# Altium PCB Ethernet_bridge.PcbDoc
Units mil, origin at the board's own origin, x right, y up, seen from the top; angles counter-clockwise.
Board outline 6000 x 4000 mil, 2 copper layers (Top Layer, Bottom Layer); 120 components, 82 nets, 415 pads, 0 vias.
Unrouted connection lines stored in the file: 282.
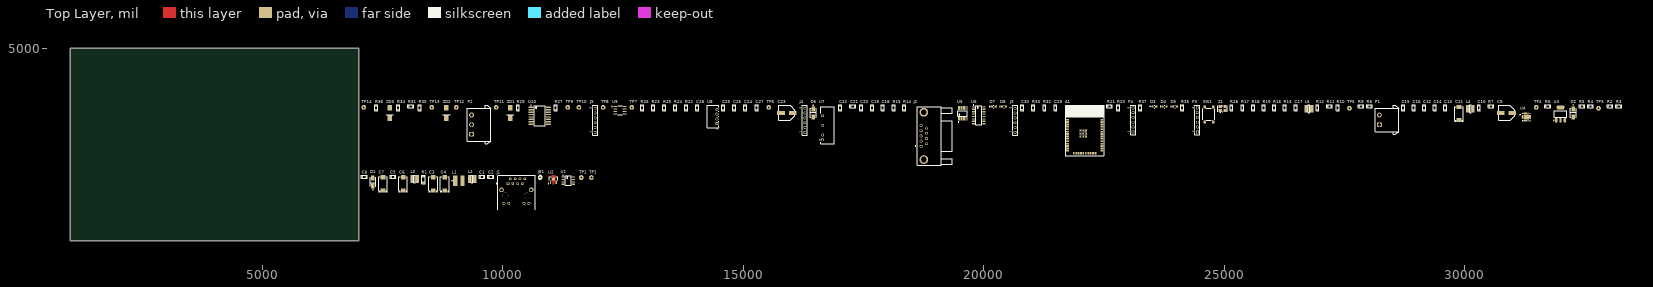
[diagram p0: Top Layer view]
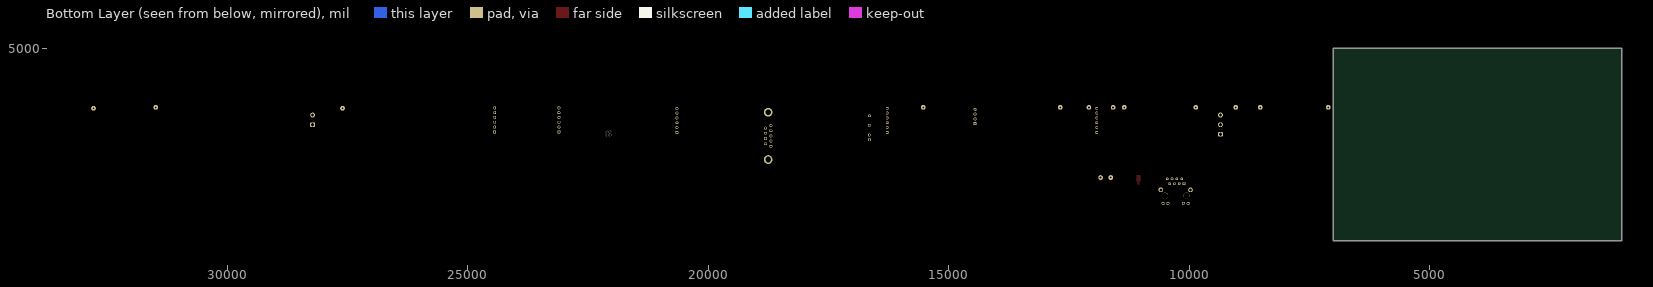
[diagram p1: Bottom Layer view, seen from below]

## Layer stack, top to bottom
Top Solder: solder mask 0.4, Solder Resist, Dk 3.5
Top Layer: signal copper 1.4
Dielectric 1: dielectric 12.6, FR-4, Dk 4.8
Bottom Layer: signal copper 1.4
Bottom Solder: solder mask 0.4, Solder Resist, Dk 3.5

## Board outline
1000,1000 7000,1000 7000,5000 1000,5000

## Design rules (kind name [scope] priority, off if disabled: settings)
Clearance [All] p1: gap=10 ignorepadtopadclearanceinfootprint=FALSE
PolygonConnect [All] p1: connectstyle=Relief reliefconductorwidth=10 reliefentries=4 polygonreliefangle="90 Angle" airgapwidth=10
RoutingVias [All] p1: holewidth=28 width=50 viastyle="Through Hole" minholewidth=28 minwidth=50 maxholewidth=28 maxwidth=50
SolderMaskExpansion [All] p1: expansion=4 istentingtop=FALSE
SupplyNets "Schematic Supply Nets_6" [InNet('GND')] p1: voltage=0.000
SupplyNets "Schematic Supply Nets_5" [InNet('+5V')] p2: voltage=0.000
SupplyNets "Schematic Supply Nets_4" [InNet('VCC')] p3: voltage=0.000
SupplyNets "Schematic Supply Nets_3" [InNet('GND_2')] p4: voltage=0.000
SupplyNets "Schematic Supply Nets_2" [InNet('+3V3_MCU')] p5: voltage=0.000
SupplyNets "Schematic Supply Nets_1" [InNet('3v3')] p6: voltage=0.000
SupplyNets "Schematic Supply Nets" [InNet('+5V_ISO')] p7: voltage=0.000
Width [All] p1: maxlimit=10 minlimit=10 preferedwidth=10
30 further rules are at their usual default settings.

## Components (designator, comment, footprint, x,y, rotation, side; value= is the part's Value field where it differs from the comment)
A1 "MOD-ESP32-WROOM-32E" MOD-ESP32-WROOM-32E 22100,3165 r0 top
C1 "10uF" CAP-0805 9565,2330 r0 top
C2 "0.1uF" CAP-0805 9745,2330 r0 top
C3 "100uF_16V" CAP-TAN-D 8550,2180 r90 top
C4 "100uF_16V" CAP-TAN-D 8790,2180 r90 top
C5 "470pF" CAP-0805 7715,2330 r0 top
C6 "100uF_16V" CAP-TAN-D 7925,2180 r90 top
C7 "100uF_16V" CAP-TAN-D 7505,2180 r90 top
C8 "0.1uF" CAP-0805 7115,2330 r0 top
C9 "330uF 25V" CAP_SMD_Size_E 30875,3655 r0 top
C10 "0.47uF" CAP-0805 30305,3760 r90 top
C11 "47uF_16V" CAP-TAN-D 29890,3640 r90 top
C12 "0.1uF" CAP-0805 29165,3760 r90 top
C13 "1uF" CAP-0805 29605,3760 r90 top
C14 "470pF" CAP-0805 29385,3760 r90 top
C15 "0.1uF" CAP-0805 28725,3760 r90 top
C16 "0.1uF" CAP-0805 28945,3760 r90 top
C17 "22nF" CAP-0805 26490,3760 r90 top
C18 "0.1uF" CAP-0805 17905,3760 r90 top
C19 "0.1uF" CAP-0805 17685,3760 r90 top
C20 "0.1uF" CAP-0805 17455,3760 r90 top
C21 "0.1uF" CAP-0805 17275,3790 r0 top
C22 "100nF" CAP-0805 17015,3760 r90 top
C23 "330uF 25V" CAP_SMD_Size_E 15905,3655 r0 top
C24 "100nF" CAP-0805 15045,3760 r90 top
C25 "100nF" CAP-0805 14585,3760 r90 top
C26 "100nF" CAP-0805 14815,3760 r90 top
C27 "100nF" CAP-0805 15280,3760 r90 top
C28 "0.47uF" CAP-0805 14045,3760 r90 top
C29 "0.1uF" CAP-0805 21495,3760 r90 top
C30 "0.1uF" CAP-0805 20805,3760 r90 top
D1 "ES1G" FP-403AE-MFG 7295,2220 r90 top
D2 "SS14" DO-214-AC 32265,3655 r90 top
D3 "LED" LED_GREEN 23550,3790 r0 top
D4 "LED" LED_RED 23765,3790 r0 top
D5 "LED" LED_RED 23980,3790 r0 top
D6 "SS14" DO-214-AC 16455,3655 r90 top
D7 "LED" LED_GREEN 20210,3790 r0 top
D8 "LED" LED_RED 20425,3790 r0 top
J1 "RJ45" RJ-45 10280,1930 r0 top
J2 "DB9 pcb" "DB9 -2 CONN PCB" 18700,3175 r90 top
J3 "61300611821" 61300611821 20655,3500 r90 top
J4 "61300611821" 61300611821 16280,3500 r90 top
J5 "61300611821" 61300611821 11920,3500 r90 top
JE1 "Jumper" JE 10775,2315 r0 top
L1 "3.3µH, 4A" WE-PD2_5848 9085,2245 r0 top
L2 "Coil" Coil_4.5x4.5_mm 9360,2280 r0 top
L3 "Coil" Coil_4.5x4.5_mm 8165,2280 r0 top
L4 "Coil" Coil_4.5x4.5_mm 30125,3740 r0 top
L5 "Coil" Coil_4.5x4.5_mm 26770,3740 r0 top
P1 "691305540002" 691305540002 28390,3510 r90 top
P2 "691305540003" 691305540003 9505,3410 r90 top
P3 "61300611121" 61300611121 24445,3510 r90 top
P4 "61300611121" 61300611121 23110,3510 r90 top
R1 "0.33" RES-1206 8350,2270 r90 top
R2 "49.9R 1%" RES-0805 33030,3790 r0 top
R3 "49.9R 1%" RES-0805 33210,3790 r0 top
R4 "49.9R 1%" RES-0805 32625,3790 r0 top
R5 "49.9R 1%" RES-0805 32445,3790 r0 top
R6 "3.8K" RES-0805 31735,3790 r0 top
R7 "1.2K" RES-0805 30555,3790 r0 top
R8 "1K" RES-0805 28025,3790 r0 top
R9 "1K" RES-0805 27850,3790 r0 top
R10 "33R" RES-0805 27370,3760 r90 top
R11 "12.1K  1%" RES-0805 27195,3790 r0 top
R12 "1.5K" RES-0805 26945,3760 r90 top
R13 "10K" RES-0805 26265,3760 r90 top
R14 "33R" RES-0805 18350,3760 r90 top
R15 "33R" RES-0805 18130,3760 r90 top
R16 "10K" RES-0805 26045,3760 r90 top
R17 "220" RES-0805 25385,3760 r90 top
R18 "220" RES-0805 25605,3760 r90 top
R19 "220" RES-0805 25825,3760 r90 top
R20 "10K" RES-0805 22800,3760 r90 top
R21 "10K" RES-0805 22620,3790 r0 top
R22 "10K" RES-0805 13815,3760 r90 top
R23 "10K" RES-0805 13125,3760 r90 top
R24 "10K" RES-0805 13585,3760 r90 top
R25 "10K" RES-0805 13355,3760 r90 top
R26 "10K" RES-0805 12895,3760 r90 top
R27 "100" RES-0805 11100,3760 r90 top
R28 "10K" RES-0805 25155,3760 r90 top
R29 "100" RES-0805 10315,3760 r90 top
R30 "10K" RES-0805 8270,3760 r90 top
R31 "10K" RES-0805 8085,3790 r0 top
R32 "220" RES-0805 21265,3760 r90 top
R33 "220" RES-0805 21035,3760 r90 top
R34 "10K" RES-0805 7825,3760 r90 top
R35 "33R" RES-0805 24135,3760 r90 top
R36 "10K" RES-0805 7365,3760 r90 top
R37 "10K" RES-0805 23255,3760 r90 top
SW1 "430152050826" 430152050826 24685,3625 r90 top
TP1 "Test_Point_PCB" Test_Point 11630,2310 r0 top
TP2 "Test_Point_PCB" Test_Point 11840,2310 r0 top
TP3 "Test_Point_PCB" Pin_Test_Point(Orange) 32790,3750 r0 top
TP4 "Test_Point_PCB" Test_Point 31495,3770 r0 top
TP5 "Test_Point_PCB" Pin_Test_Point(Pink) 27610,3750 r0 top
TP6 "Test_Point_PCB" Test_Point 15530,3770 r0 top
TP7 "Test_Point_PCB" Test_Point 12680,3770 r0 top
TP8 "Test_Point_PCB" Test_Point 12085,3770 r0 top
TP9 "Test_Point_PCB" Test_Point 11350,3770 r0 top
TP10 "Test_Point_PCB" Test_Point 11580,3770 r90 top
TP11 "Test_Point_PCB" Test_Point 9860,3770 r90 top
TP12 "Test_Point_PCB" Test_Point 9030,3770 r90 top
TP13 "" Test_Point 8520,3770 r90 top
TP14 "Test_Point_PCB" Test_Point 7105,3770 r90 top
U1 "MC34063" SOIC-8_M 11360,2245 r0 top
U2 "AMS1117-5" SOT-89 11050,2280 r0 top
U3 "AMS1117-3.3" SOT-223 32000,3635 r0 top
U4 "LAN7820A" 24QFN-4x4B-IPC_A 31290,3570 r0 top
U5 "TMUX1574PWR" TSSOP-16-A 19565,3645 r90 top
U6 "MAX3232" SOIC-16-M 19900,3605 r0 top
U7 "B1212S-3WR2" B1212S-3WR2 16745,3395 r90 top
U8 "B0505S-1W" B0505S-1W 14370,3580 r90 top
U9 "MAX485" SOIC-8-MFG 12435,3710 r0 top
U10 "ADUM1401BRWZ" ADI-RW-16_M 10765,3595 r0 top
Z1 "50.00 Mhz" "50.00Mhz active quartz" 24970,3745 r0 top
ZD1 "P6SMB16CA" DO-214AA 10150,3565 r90 top
ZD2 "P6SMB16CA" DO-214AA 8825,3565 r90 top
ZD3 "P6SMB16CA" DO-214AA 7645,3565 r90 top

## Footprints (in the part's own frame and the unit in brackets; to place one, negate y for a bottom-side part, rotate by r counter-clockwise, add the part's x,y. Pads: shape width x height; smd on the part's side, far side on the other; paste and mask are expansions set on the pad)
24QFN-4x4B-IPC_A [mm]
  rect 0.961x0.239 smd paste+0 mask+0: 1(-1.976,1.25)
  rrect100% 0.961x0.239 smd paste+0 mask+0: 2(-1.976,0.75) 3(-1.976,0.25) 4(-1.976,-0.25) 5(-1.976,-0.75) 6(-1.976,-1.25) 13(1.976,-1.25) 14(1.976,-0.75) 15(1.976,-0.25) 16(1.976,0.25) 17(1.976,0.75) 18(1.976,1.25)
  rrect100% 0.239x0.961 smd paste+0 mask+0: 7(-1.25,-1.976) 8(-0.75,-1.976) 9(-0.25,-1.976) 10(0.25,-1.976) 11(0.75,-1.976) 12(1.25,-1.976) 19(1.25,1.976) 20(0.75,1.976) 21(0.25,1.976) 22(-0.25,1.976) 23(-0.75,1.976) 24(-1.25,1.976)
  rect 2.6x2.6 smd paste-1000 mask+0: 25(0,0)
  silkscreen extent -3.38,-2 2,2, body extent -2.96,-2.96 2.96,2.96, height 0.25
"50.00Mhz active quartz" [mm] "50.00Mhz active quartz"
  rect 1.7x1.5 smd: 1(-1.27,-1.1) 2(1.27,-1.1) 3(1.27,1.1) 4(-1.27,1.1)
  silkscreen extent -2.5,-2.1 2.5,1.6, body extent -2.5,-1.6 2.5,1.6, height 1.29
61300611121 [mm] "Pin Header, pitch 2.54 mm, THT, Vertical, single row, 6p"
  rrect50% 1.6x1.6 hole 1.1: 1(-6.35,0)
  round 1.6 hole 1.1: 2(-3.81,0) 3(-1.27,0) 4(1.27,0) 5(3.81,0) 6(6.35,0)
  silkscreen extent -7.77,-1.35 7.77,1.35, body extent -7.62,-1.27 7.62,1.27, height 8.57
61300611821 [mm] "Socket Header, Pitch 2.54 mm, THT, Vertical, single row, 6p"
  rrect50% 1.52x1.52 hole 1.02: 1(-6.35,0)
  round 1.52 hole 1.02: 2(-3.81,0) 3(-1.27,0) 4(1.27,0) 5(3.81,0) 6(6.35,0)
  silkscreen extent -8,-1.35 8,1.35, body extent -7.87,-1.25 7.87,1.25, height 8.55
430152050826 [mm] "SMD Tact Switch, body 6x6mm"
  rect 1.55x1.3 smd: A1(-3.975,2.25) A2(3.975,2.25) B1(-3.975,-2.25) B2(3.975,-2.25)
  silkscreen extent -3.1,-3.1 3.1,3.1, body extent -4.5,-3.1 4.5,3.1, height 5
691305540002 [mm] "5,08mm - PCB Header Horizontal Entry with Plastic Latches - 02p"
  rrect50% 2.55x2.55 hole 1.7: 1(-2.54,4)
  round 2.55 hole 1.7: 2(2.54,4)
  silkscreen extent -7.65,-6.15 7.65,6.15, body extent -7.48,-6 7.48,6, height 8.63
691305540003 [mm] "5,08mm - PCB Header Horizontal Entry with Plastic Latches - 03p"
  rrect50% 2.55x2.55 hole 1.7: 1(-5.08,4)
  round 2.55 hole 1.7: 2(0,4) 3(5.08,4)
  silkscreen extent -10.19,-6.15 10.19,6.15, body extent -10.02,-6 10.02,6, height 8.63
ADI-RW-16_M [mm] "SOIC, 16-Leads, Body 10.3x7.5mm, Pitch 1.27mm, IPC Low Density"
  oval 2.6x0.7 smd: 1(-4.625,4.445) 2(-4.625,3.175) 3(-4.625,1.905) 4(-4.625,0.635) 5(-4.625,-0.635) 6(-4.625,-1.905) 7(-4.625,-3.175) 8(-4.625,-4.445) 9(4.625,-4.445) 10(4.625,-3.175) 11(4.625,-1.905) 12(4.625,-0.635) 13(4.625,0.635) 14(4.625,1.905) 15(4.625,3.175) 16(4.625,4.445)
  silkscreen extent -4.75,-5.25 2.93,5.47, body extent -3.8,-5.25 3.8,5.25, height 2.65
B0505S-1W [mm]
  rect 1.55x1.55 hole 1 paste-2539.97 mask+0: 1(-3.81,-2.1)
  round 1.55 hole 1 paste-2539.97 mask+0: 2(-1.27,-2.1) 3(1.27,-2.1) 4(3.81,-2.1)
  silkscreen extent -6.52,-3.13 5.92,3.13, body extent -6.02,-3.22 6.02,3.22, height 0.25
B1212S-3WR2 [mm]
  rect 1.5x1.5 hole 1: 1(-7.62,2.413)
  round 1.5 hole 1: 2(-5.08,2.413) 4(0,2.413) 6(5.08,2.413)
  silkscreen extent -9.83,-3.74 9.82,3.81, body extent -9.8,-3.68 9.8,3.32, height 10
CAP-0805 [mm]
  rect 0.8x1.25 smd mask+0.015: 1(-1,0) 2(1,0)
  silkscreen extent -1.52,-0.76 1.52,0.76, body extent -1,-0.62 1,0.63, height 0.8
CAP-TAN-D [mm]
  rect 2.2x2.5 smd: 1(-3.45,0) 2(3.45,0)
  silkscreen extent -4.5,-2.4 3.65,2.4, body extent -3.8,-2.3 3.8,2.3, height 4
CAP_SMD_Size_E [mm]
  rect 4x2 smd: 1(3.175,0) 2(-3.048,0)
  silkscreen extent -4.19,-3.94 4.32,4.06, body extent -4.25,-4 4.25,4, height 10.59
Coil_4.5x4.5_mm [mm]
  rect 1.8x4 smd: 1(-1.397,0) 2(1.397,0)
  silkscreen extent -0.38,-2.03 0.38,2.03, body extent -2.07,-2.07 2.07,2.07, height 2.8
"DB9 -2 CONN PCB" [mm] "DB9 -2 CONN PCB"
  round 1.56 hole 1.04: 1(-5.461,0) 2(-2.718,0) 3(0.025,0) 4(2.769,0) 5(5.512,0) 6(-4.089,-2.84) 7(-1.346,-2.84) 8(1.397,-2.84) 9(4.14,-2.84)
  round 4.605 hole 3.07: MH1(-12.47,-1.42) MH2(12.52,-1.42)
  silkscreen extent -15.38,-16.48 15.43,3.15, body extent -15.49,-16.79 15.55,1.81, height 12.39
DO-214-AC [mm]
  rect 2.65x1.75 smd paste+0 mask+0: 1(-2.15,0) 2(2.15,0)
  silkscreen extent -2.37,-1.48 4.17,1.48, body extent -3.57,-1.58 3.57,1.58, height 0.25
DO-214AA [mm]
  rect 3x2.4 smd: 1(-0.381,0) 2(4.953,0)
  silkscreen extent 1.27,-1.91 1.27,1.91, body extent -0.53,-1.85 5.07,2.1, height 2.65
FP-403AE-MFG [mm]
  rect 2.65x1.75 smd paste+0 mask+0: 1(-2.15,0) 2(2.15,0)
  silkscreen extent -4.17,-1.48 2.37,1.48, body extent -3.57,-1.58 3.57,1.58, height 0.25
JE [mil]
  rect 50x27.56 smd: 1(1,20) 2(1,-21)
  silkscreen extent -39,-39 39,39
LED_GREEN [mm]
  rect 1.1x1.2 smd paste+0 mask+0: 1(-1.05,0) 2(1.05,0)
  silkscreen extent -2.27,-0.67 0.13,0.67, body extent -1,-0.63 1,0.63, height 0.8
LED_RED [mm]
  rect 1.1x1.2 smd paste+0 mask+0: 1(-1.05,0) 2(1.05,0)
  silkscreen extent -2.27,-0.67 0.13,0.67, body extent -1.7,-0.77 1.7,0.77, height 0.25
MOD-ESP32-WROOM-32E [mm]
  rect 1.5x0.9 smd paste+0 mask+0.05: 1(-9.05,8.89) 2(-9.05,7.62) 3(-9.05,6.35) 4(-9.05,5.08) 5(-9.05,3.81) 6(-9.05,2.54) 7(-9.05,1.27) 8(-9.05,0) 9(-9.05,-1.27) 10(-9.05,-2.54) 11(-9.05,-3.81) 12(-9.05,-5.08) 13(-9.05,-6.35) 14(-9.05,-7.62) 25(9.05,-7.62) 26(9.05,-6.35) 27(9.05,-5.08) 28(9.05,-3.81) 29(9.05,-2.54) 30(9.05,-1.27) 31(9.05,0) 32(9.05,1.27) 33(9.05,2.54) 34(9.05,3.81) 35(9.05,5.08) 36(9.05,6.35) 37(9.05,7.62) 38(9.05,8.89)
  rect 0.9x1.5 smd paste+0 mask+0.05: 15(-5.715,-8.89) 16(-4.445,-8.89) 17(-3.175,-8.89) 18(-1.905,-8.89) 19(-0.635,-8.89) 20(0.635,-8.89) 21(1.905,-8.89) 22(3.175,-8.89) 23(4.445,-8.89) 24(5.715,-8.89)
  rect 1.05x1.05 smd paste+0 mask+0.05: 39(-2.225,-0.035) 39(-2.225,1.49) 39(-2.225,3.015) 39(-0.7,-0.035) 39(-0.7,1.49) 39(-0.7,3.015) 39(0.825,-0.035) 39(0.825,1.49) 39(0.825,3.015)
  round 0.6 hole 0.3: 39(-2.225,0.74) 39(-2.225,2.24) 39(-1.475,-0.035) 39(-1.475,3.015) 39(-1.45,1.49) 39(-0.7,0.74) 39(-0.7,2.265) 39(0.05,-0.06) 39(0.075,1.49) 39(0.075,3.015) 39(0.825,0.74) 39(0.825,2.265)
  silkscreen extent -10.3,-10.08 10.25,16.62, body extent -9.04,-9.16 9.04,16.38, height 3
Pin_Test_Point(Orange) [mm]
  round 2.5 hole 0.95: 1(0,0)
  body extent -1.3,-1.78 1.3,1.78, height 6.93
Pin_Test_Point(Pink) [mm]
  round 2.5 hole 0.95: 1(0,0)
  body extent -1.3,-1.78 1.3,1.78, height 6.93
RES-0805 [mm]
  rect 0.8x1.25 smd mask+0.015: 1(-1,0) 2(1,0)
  silkscreen extent -1.52,-0.76 1.52,0.76, body extent -1,-0.62 1,0.63, height 0.6
RES-1206 [mm]
  rect 1x1.6 smd: 1(-1.6,0) 2(1.6,0)
  silkscreen extent -2.29,-1.02 2.29,1.02, body extent -1.6,-0.8 1.6,0.8, height 0.6
RJ-45 [mm] "RJ-45  connector"
  rect 1.4x1.4 hole 0.9 paste-2539.97 mask+0: 1(-4.445,6.425)
  round 1.4 hole 0.9 paste-2539.97 mask+0: 2(-3.175,8.965) 3(-1.905,6.425) 4(-0.635,8.965) 5(0.635,6.425) 6(1.905,8.965) 7(3.175,6.425) 8(4.445,8.965)
  round 1.57 hole 1.02 paste-2539.97 mask+0: 9(-6.64,-3.985) 10(-4.1,-3.985) 11(4.1,-3.985) 12(6.64,-3.985)
  round 2.45 hole 1.6 paste-2539.97 mask+0: 13(-7.85,3.125) 14(7.85,3.125)
  round 3.25 hole 3.25 unplated paste-2539.97 mask+0: ""(-5.715,0.075) ""(5.715,0.075)
  silkscreen extent -10.59,-7.37 9.87,10.8, body extent -9.97,-10.9 9.97,10.9, height 0.25
SOIC-8-MFG [mm]
  rect 1.98x0.53 smd paste+0 mask+0: 1(-2.465,1.905) 2(-2.465,0.635) 3(-2.465,-0.635) 4(-2.465,-1.905) 5(2.465,-1.905) 6(2.465,-0.635) 7(2.465,0.635) 8(2.465,1.905)
  silkscreen extent -4.27,-2.5 1.1,2.5, body extent -3.55,-2.75 3.55,2.75, height 0.25
SOIC-8_M [mm]
  rrect15% 1.65x0.65 smd: 1(-2.825,1.905) 2(-2.825,0.635) 3(-2.825,-0.635) 4(-2.825,-1.905) 5(2.825,-1.905) 6(2.825,-0.635) 7(2.825,0.635) 8(2.825,1.905)
  silkscreen extent -2.95,-2.5 1.6,2.9, body extent -3,-2.45 3,2.45, height 1.63
SOIC-16-M [mm]
  rrect15% 1.65x0.65 smd: 1(-2.825,4.445) 2(-2.825,3.175) 3(-2.825,1.905) 4(-2.825,0.635) 5(-2.825,-0.635) 6(-2.825,-1.905) 7(-2.825,-3.175) 8(-2.825,-4.445) 9(2.825,-4.445) 10(2.825,-3.175) 11(2.825,-1.905) 12(2.825,-0.635) 13(2.825,0.635) 14(2.825,1.905) 15(2.825,3.175) 16(2.825,4.445)
  silkscreen extent -2.95,-5 1.6,5.44, body extent -3,-4.95 3,4.95, height 1.59
SOT-89 [mm]
  rect 0.58x1.73 smd paste+0 mask+0: 1(-1.5,-1.781) 3(1.5,-1.781)
  round 1.74 smd paste+0 mask+0: 2(0,0)
  Top Layer region: -0.38,-2.646 -0.38,-1.146 -0.967,-1.146 -0.967,1.884 0.967,1.884 0.967,-1.146 0.38,-1.146 0.38,-2.646
  silkscreen extent -2.7,-2.47 2.3,1.15, body extent -2.4,-2.75 2.4,1.98, height 0.25
SOT-223 [mm]
  rect 1.2x2.6 smd paste+0 mask+0: 1(-2.29,-3.395)
  rrect100% 1.2x2.6 smd paste+0 mask+0: 2(0,-3.395) 3(2.29,-3.395)
  rrect59% 4x2.2 smd paste+0 mask+0: 2(0,3.395)
  silkscreen extent -3.62,-3.52 3.25,1.75, body extent -3.75,-4.7 3.75,4.7, height 0.25
Test_Point [mm]
  round 2.5 hole 0.95: 1(0,0)
TSSOP-16-A [mm] "TSSOP-16 pacadge"
  rect 1.955x0.421 smd paste+0 mask+0: 1(-2.875,2.275)
  rrect100% 1.955x0.421 smd paste+0 mask+0: 2(-2.875,1.625) 3(-2.875,0.975) 4(-2.875,0.325) 5(-2.875,-0.325) 6(-2.875,-0.975) 7(-2.875,-1.625) 8(-2.875,-2.275) 9(2.875,-2.275) 10(2.875,-1.625) 11(2.875,-0.975) 12(2.875,-0.325) 13(2.875,0.325) 14(2.875,0.975) 15(2.875,1.625) 16(2.875,2.275)
  silkscreen extent -4.73,-2.5 1.4,2.5, body extent -4.35,-3 4.35,3, height 0.25
WE-PD2_5848 [mm] "SMD Power Inductor, 2-Leads, body 5.8x5.2mm"
  rect 2.15x5.5 smd: 1(-1.925,0) 2(1.925,0)
  silkscreen extent -3.67,-0.12 -3.42,0.12, body extent -2.9,-2.6 2.89,2.6, height 4.48

## Part data
C1 C2 C5 C8 C10 C12 C13 C14 C15 C16 C17 C18 C19 C20 C21 C22 C24 C25 C26 C27 C28 C29 C30: library part CAP-NON-POLAR
C3 C4 C6 C7 C9 C23: library part CAP_POL_SMD
C11: library part CAP-POLAR
D1: "Ultrafast"
D3 D4 D5 D7 D8: "WURTH ELEKTRONIK - 151031YS06000 - LED, Yellow, Through Hole, T-1 (3mm), 30 mA, 2 V, 590 nm", Manufacturer_Name="Wurth Elektronik", Manufacturer_Part_Number=151031YS06000, Mouser Part Number=710-151031YS06000, Datasheet Link=https://katalog.we-online.de/led/datasheet/151031YS06000.pdf, Geometry.Height=5.5mm, Mouser Price/Stock=https://www.mouser.co.uk/ProductDetail/Wurth-Elektronik/151031YS06000?qs=LlUlMxKIyB3xSYYW%252BcuBiQ%3D%3D
J1: library part HRK1-1B72F09
J2: library part DB9
J3 J4 J5: "WR-PHD Socket Header, THT, Vertical, pitch 2.54mm, 1 Row, 6P", Contact Resistance=20mΩ, Manufacturer="Wurth Elektronik", Operating Temperature Max=125°C, Operating Temperature Min=-40°C, Rated Current=3A, Withstanding Voltage=500V, Working Voltage=250V, Category="Board-to-Board Connectors", ComponentLink1Description="Website Link", ComponentLink1URL=https://www.we-online.com/redexpert/article/61300611821?ad, ComponentLink2Description="Datasheet Link", ComponentLink2URL=https://www.we-online.com/redexpert/spec/61300611821?ad, Gender="Socket Header", Manufacturer Part Number=61300611821, Match Code=WR-PHD, Mount="Through Hole", Number of Pins=6, Number of Rows=1, Orientation=Vertical, Packaging=Tray, Pitch=2.54mm
JE1: library part JE
L1: library part 744774033, "WE-PD2 SMT Power Inductor, size 5848, 3.3µH, 4A, 0.06Ω", Case/Size Code=5848, DC Resistance=0.042Ω, DC Resistance Max=0.06Ω, Inductance=3.3µH, Manufacturer="Wurth Elektronik", Operating Temperature Max=125°C, Operating Temperature Min=-40°C, Rated Current=4A, Saturation Current=7.5A, Self Resonant Frequency=43MHz, Category="Unshielded Power Inductors", ComponentLink1Description="Website Link", ComponentLink1URL=https://www.we-online.com/redexpert/article/744774033?ad, ComponentLink2Description="Datasheet Link", ComponentLink2URL=https://www.we-online.com/redexpert/spec/744774033?ad, Height=4.5mm, Length=5.8mm, Manufacturer Part Number=744774033, Match Code=WE-PD2, Mount="Surface Mount", Packaging="Tape and Reel", Width=5.2mm, Simulation ModelName=5848_744774033_3.3u, Simulation ModelText=".subckt 5848_744774033_3.3u 1 2 / Rp 1 2 12000 / Cp 1 2 3.4p / Rs 1 N3 0.042 / L1 N3 2 3.3u / .ends 5848_744774033_3.3u", Simulation PortMap=(1:1),(2:2)
P1: "WR-TBL Series 3055 PCB Header Horizontal Entry with Plastic Latches, THT, pitch 5.08mm, 2p", Manufacturer="Wurth Elektronik", Operating Temperature Max=105°C, Operating Temperature Min=-40°C, Rated Current=16A, Working Voltage=300V, Application=Pluggable, Category="Terminal Blocks", ComponentLink1Description="Website Link", ComponentLink1URL=https://www.we-online.com/redexpert/article/691305540002?ad, ComponentLink2Description="Datasheet Link", ComponentLink2URL=https://www.we-online.com/redexpert/spec/691305540002?ad, Manufacturer Part Number=691305540002, Match Code=WR-TBL, Modularity=No, Mount="Through Hole", Number of Pins=2, Number of Rows=1, Orientation=Horizontal, Packaging=Box, Pitch=5.08mm
P2: "WR-TBL Series 3055 PCB Header Horizontal Entry with Plastic Latches, THT, pitch 5.08mm, 3p", Manufacturer="Wurth Elektronik", Operating Temperature Max=105°C, Operating Temperature Min=-40°C, Rated Current=16A, Working Voltage=300V, Application=Pluggable, Category="Terminal Blocks", ComponentLink1Description="Website Link", ComponentLink1URL=https://www.we-online.com/redexpert/article/691305540003?ad, ComponentLink2Description="Datasheet Link", ComponentLink2URL=https://www.we-online.com/redexpert/spec/691305540003?ad, Manufacturer Part Number=691305540003, Match Code=WR-TBL, Modularity=No, Mount="Through Hole", Number of Pins=3, Number of Rows=1, Orientation=Horizontal, Packaging=Box, Pitch=5.08mm
P3 P4: "WR-PHD Pin Header, THT, Vertical, pitch 2.54mm, 1 Row, 6P", Contact Resistance=20mΩ, Manufacturer="Wurth Elektronik", Operating Temperature Max=105°C, Operating Temperature Min=-40°C, Rated Current=3A, Withstanding Voltage=500V, Working Voltage=250V, Category="Board-to-Board Connectors", ComponentLink1Description="Website Link", ComponentLink1URL=https://www.we-online.com/redexpert/article/61300611121?ad, ComponentLink2Description="Datasheet Link", ComponentLink2URL=https://www.we-online.com/redexpert/spec/61300611121?ad, Gender="Pin Header", Manufacturer Part Number=61300611121, Match Code=WR-PHD, Mount="Through Hole", Number of Pins=6, Number of Rows=1, Orientation=Vertical, Packaging=Bag, Pitch=2.54mm
R1 R2 R3 R4 R5 R7 R8 R9 R10 R12 R13 R14 R15 R16 R17 R18 R19 R20 R21 R22 R23 R24 R25 R26 R27 R28 R29 R30 R31 R32 R33 R34 R35 R36 R37: library part RES-CONST
R6: library part RES-CONST, "10K"
R11: library part RES-CONST, "12.1K"
SW1: "WS-TASV SMT Tact Switch, 6mm x 6mm, 260gf, SPST-NO, 12V, 50mA", Manufacturer="Wurth Elektronik", Max Operating Temperature=85°C, Min Operating Temperature=-40°C, Rated Current=50mA, Rated Voltage (DC)=12V, Category="Tact Switch", Circuit=SPST-NO, ComponentLink1Description="Website Link", ComponentLink1URL=https://www.we-online.com/redexpert/article/430152050826?ad, ComponentLink2Description="Datasheet Link", ComponentLink2URL=https://www.we-online.com/redexpert/spec/430152050826?ad, Contact Material="Stainless Steel", Contact Plating=Silver, Height=5mm, Length=6mm, Manufacturer Part Number=430152050826, Match Code=WS-TASV, Mount="Surface Mount", Operation Force=260gf, Packaging="Tape and Reel", Terminal Material="Copper Alloy", Terminal Plating=Silver, Washable=No, Width=6mm
TP1 TP2 TP3 TP4 TP5 TP6 TP7 TP8 TP9 TP10 TP11 TP12 TP13 TP14: library part TP_PCB?, "Test_Point"
U2 U3: library part AMS1117
U10: library part CMP-0534-00565-1, "Quad Channel Digital Isolator, 2.5 KV rms Insulation Rating, 10 Mbps Data Rate, 50 ns Delay, Industrial, 16-pin SOIC (RW-16), Tube", Manufacturer="Analog Devices", Max Operating Temp (degreesC)=125, Code_JEDEC=MS-013-AA, ComponentLink1Description="Manufacturer URL", ComponentLink1URL=http://www.analog.com/en/index.html, ComponentLink2Description=Datasheet, ComponentLink2URL=http://www.analog.com/static/imported-files/data_sheets/ADuM1400_1401_1402.pdf, ComponentLink3Description="Package Specification", ComponentLink3URL=http://www.analog.com/static/imported-files/packages/PKG_PDF/SOIC_WIDE%20%28RW%29/RW_16.pdf, ComponentLink4Description="URL Link1", ComponentLink4URL="Product URL:http://www.analog.com/en/interface-isolation/digital-isolators/adum1401/products/product.html", ComponentLink5Description="URL Link2", ComponentLink5URL="Reference Circuit:http://www.analog.com/en/interface-isolation/digital-isolators/adum1401/products/product.html#product-recommendations", DatasheetVersion="Rev. H", Max Data Rate=10Mbps, Mounting Technology="Surface Mount", PackageDescription="16-Pin Standard Small Outline Package, Body 10.3 x 7.5 mm, Pitch 1.27 mm", PackageReference=RW-16, PackageVersion="032707-B, 03/2007", PartNumber=ADUM1401BRWZ
Z1: library part Crystal_50Mhz_active

## Nets (pads, with @x,y where several pads share a name; then routed paths per layer and width w, separated by ;. In a path a pad name is that pad's centre, name@x,y a point inside that pad or via, vN(x,y) a via of type N, cw(c..) or ccw(c..) an arc to the next point about the centre after c; other vN are vias at no path point)
3v3: C16.2 L3.1 L4.1 R12.2 R13.2 R20.2 R28.2 TP4.1 U3.2 U4.9 Z1.4
+3V3_MCU: A1.2 C11.1 C12.2 J3.1 J4.4 J5.1 L4.2 P3.4 P4.1 R16.2 R21.2 R23.2 R26.2 U10.1 U10.7
+5V: C7.1 C24.2 J4.3 P3.3 U2.2 U8.2
+5V_ISO: C25.2 C26.2 C27.2 C28.1 R22.2 R24.2 R25.2 TP6.1 U5.16 U6.16 U8.4 U9.8 U10.10 U10.16
GND: A1.1 A1.15 A1.38 A1.39 C1.1 C2.1 C3.2 C4.2 C5.2 C6.2 C7.2 C8.1 C9.2 C10.2 C11.2 C12.1 C13.1 C14.1 C15.1 C16.1 C17.1 C24.1 C29.1 C30.1 D1.2 D3.2 D4.2 D5.2 D7.2 D8.2 J1.13 J1.14 J3.2 J4.5 J4.6 J5.6 P1.1 P3.5 P3.6 P4.6 R7.1 R11.2 R30.1 R31.1 R37.1 SW1.B1 SW1.B2 TP3.1 TP5.1 U1.4 U2.1 U3.1 U4.25 U7.4 U8.1 U10.2 U10.8 Z1.2
GND_2: C20.1 C21.1 C22.1 C23.2 C25.1 C26.1 C27.1 C28.2 J2.5 J2.MH1 J2.MH2 P2.2 R34.1 R36.1 TP14.1 U5.8 U5.15 U6.15 U7.2 U8.3 U9.5 U10.9 U10.15 ZD2.1 ZD3.1
NetA1_3: A1.3 C30.2 J3.5 R21.1
NetA1_7: A1.7 J5.4 P4.4 R23.1 TP12.1 U10.6
NetA1_8: A1.8 R16.1 SW1.A1 SW1.A2
NetA1_9: A1.9 J5.5 P4.5 R30.2 R33.2 TP7.1 U10.5
NetA1_10: A1.10 U4.8
NetA1_11: A1.11 U4.7
NetA1_12: A1.12 U4.11
NetA1_13: A1.13 R18.2
NetA1_14: A1.14 R17.2
NetA1_16: A1.16 R13.1 U4.10
NetA1_23: A1.23 R19.2
NetA1_24: A1.24 J5.2 P4.2 R31.2 R32.2 TP9.1 U10.3
NetA1_25: A1.25 L5.1 R28.1 R35.1 U4.14
NetA1_27: A1.27 R37.2 Z1.1
NetA1_28: A1.28 J5.3 P4.3 R26.1 TP10.1 U10.4
NetA1_30: A1.30 R12.1 U4.12
NetA1_31: A1.31 U4.17
NetA1_33: A1.33 U4.16
NetA1_34: A1.34 J3.3
NetA1_35: A1.35 J3.4
NetA1_36: A1.36 U4.18
NetA1_37: A1.37 U4.13
NetC1_2: C1.2 C2.2 J1.4 J1.5 J1.9 J1.11 L3.2 R2.2 R3.2 R4.2 R5.2 U4.1 U4.19
NetC3_1: C3.1 JE1.2 L1.2 R6.1
NetC4_1: C4.1 C8.2 C15.2 L2.2 TP2.1 U2.3 U3.3
NetC5_1: C5.1 U1.3
NetC6_1: C6.1 JE1.1 L2.1
NetC13_2: C13.2 C14.2 U4.6
NetC17_2: C17.2 J1.7 J1.8
NetC18_1: C18.1 U6.5
NetC18_2: C18.2 U6.4
NetC19_1: C19.1 U6.3
NetC19_2: C19.2 U6.1
NetC20_2: C20.2 U6.2
NetC21_2: C21.2 U6.6
NetC22_2: C22.2 C23.1 J2.9 U7.1
NetC29_2: C29.2 R20.1 U4.15
NetD1_1: D1.1 L1.1 TP1.1 U1.2
NetD2_1: D2.1 P1.2
NetD3_1: D3.1 R17.1
NetD4_1: D4.1 R18.1
NetD5_1: D5.1 R19.1
NetD6_1: D6.1 U7.6
NetD7_1: D7.1 R33.1
NetD8_1: D8.1 R32.1
NetJ1_1: J1.1 R2.1 U4.21
NetJ1_2: J1.2 R4.1 U4.20
NetJ1_3: J1.3 R3.1 U4.23
NetJ1_6: J1.6 R5.1 U4.22
NetJ1_10: J1.10 R8.2
NetJ1_12: J1.12 R9.2
NetJ2_2: J2.2 U6.14
NetJ2_3: J2.3 U6.13
NetJ3_6: J3.6 L5.2
NetP2_1: P2.1 R22.1 U9.6 ZD1.2 ZD2.2
NetP2_3: P2.3 R34.2 U9.7 ZD1.1 ZD3.2
NetR1_2: R1.2 U1.1 U1.7 U1.8
NetR6_2: R6.2 R7.2 U1.5
NetR8_1: R8.1 U4.3
NetR9_1: R9.1 U4.2
NetR10_1: R10.1 R35.2 Z1.3
NetR10_2: R10.2 U4.5
NetR11_1: R11.1 U4.24
NetR14_1: R14.1 U6.11
NetR14_2: R14.2 U5.2
NetR15_1: R15.1 U6.12
NetR15_2: R15.2 U5.5
NetR24_1: R24.1 R27.1 TP8.1 U9.4
NetR25_1: R25.1 R29.1 TP13.1 U9.1
NetR27_2: R27.2 U5.3
NetR29_2: R29.2 U5.6
NetR36_2: R36.2 TP11.1 U9.2 U9.3 U10.12
NetU5_1: U5.1 U10.14
NetU5_4: U5.4 U10.13
NetU5_7: U5.7 U10.11
VCC: C10.1 D2.2 D6.2 J4.1 J4.2 P3.1 P3.2 R1.1 U1.6
pads on no net: A1.4 A1.5 A1.6 A1.17 A1.18 A1.19 A1.20 A1.21 A1.22 A1.26 A1.29 A1.32 C9.1 J1. J2.1 J2.4 J2.6 J2.7 J2.8 U4.4 U5.9 U5.10 U5.11 U5.12 U5.13 U5.14 U6.7 U6.8 U6.9 U6.10

## Text inside footprints (layer, text, board x,y; h text height)
J3: Top Overlay "1" at 20588.07,3242.52 h40 r90; Top Overlay "6" at 20588.07,3737.8 h40 r90
J4: Top Overlay "1" at 16213.07,3242.52 h40 r90; Top Overlay "6" at 16213.07,3737.8 h40 r90
J5: Top Overlay "1" at 11853.07,3242.52 h40 r90; Top Overlay "6" at 11853.07,3737.8 h40 r90
P3: Top Overlay "6" at 24378.07,3745.04 h40 r90; Top Overlay "1" at 24378.07,3255.28 h40 r90
P4: Top Overlay "6" at 23043.07,3745.04 h40 r90; Top Overlay "1" at 23043.07,3255.28 h40 r90